# Altium PCB LTC4054 CHARGER BOARD.PcbDoc
Units mil, origin at the board's own origin, x right, y up, seen from the top; angles counter-clockwise.
Board outline 6000 x 4000 mil, 2 copper layers (Top Layer, Bottom Layer); 7 components, 0 nets, 17 pads, 0 vias.
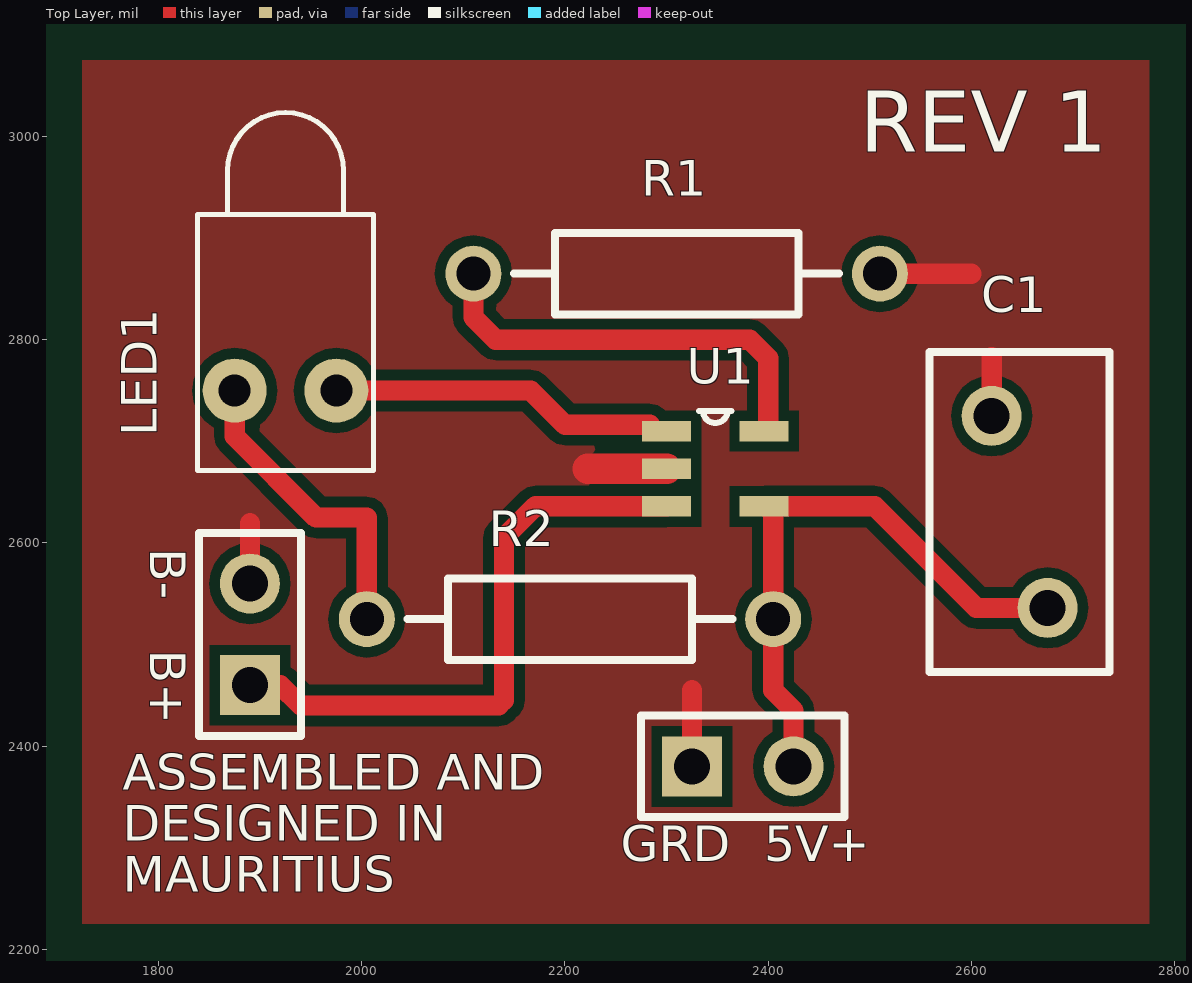
[diagram p0: Top Layer view]
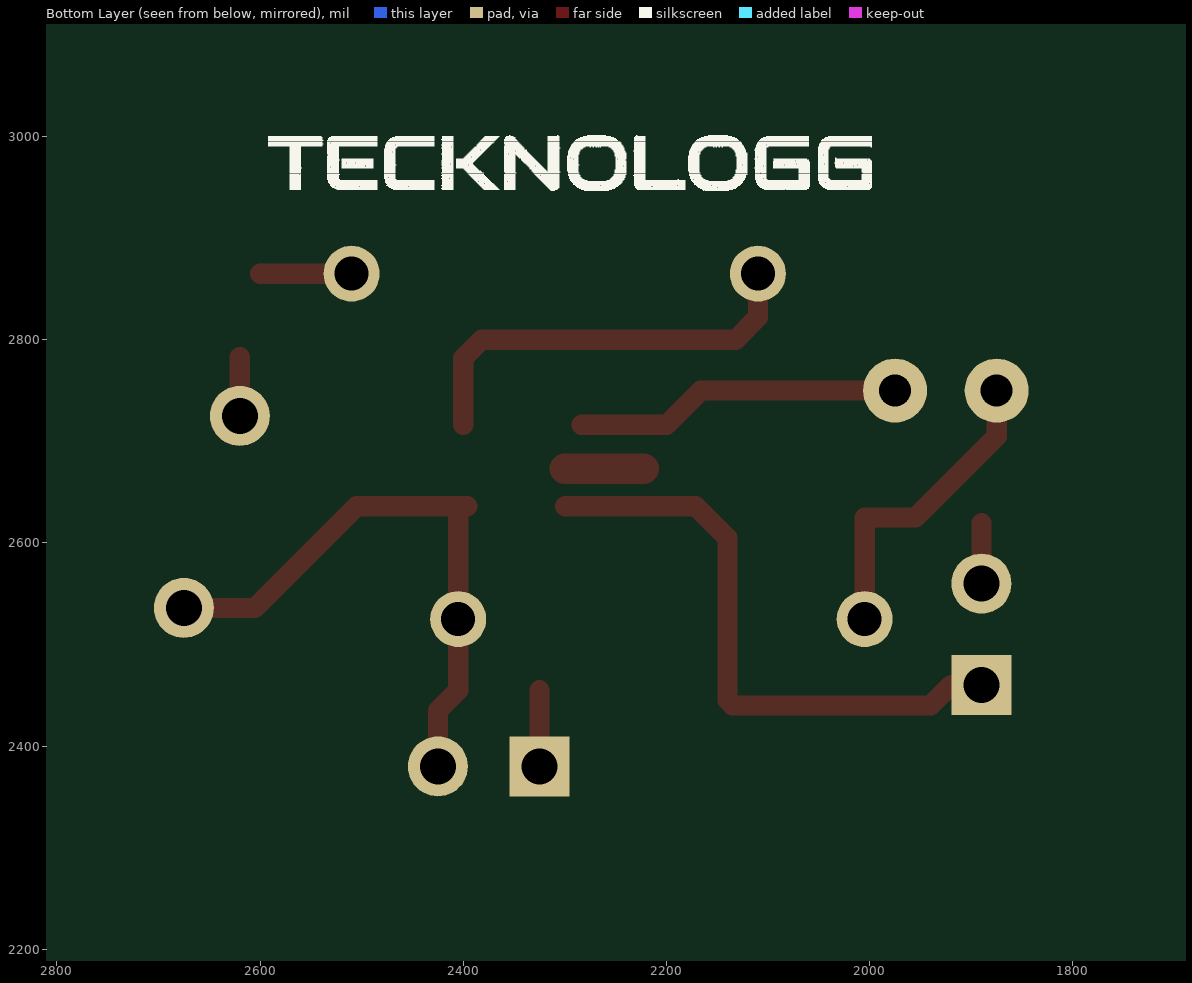
[diagram p1: Bottom Layer view, seen from below]

## Layer stack, top to bottom
Top Solder: solder mask 0.4, Solder Resist, Dk 3.5
Top Layer: signal copper 1.4
Dielectric 1: dielectric 12.6, FR-4, Dk 4.8
Bottom Layer: signal copper 1.4
Bottom Solder: solder mask 0.4, Solder Resist, Dk 3.5

## Board outline
1000,1000 7000,1000 7000,5000 1000,5000

## Design rules (kind name [scope] priority, off if disabled: settings)
Clearance [All] p1: gap=10 ignorepadtopadclearanceinfootprint=FALSE except(0: Arc-Hole Track-Hole SMDPad-Hole THPad-Hole Via-Hole Fill-Hole Poly-Hole Region-Hole Text-Hole)
PolygonConnect [All] p1: connectstyle=Relief reliefconductorwidth=10 reliefentries=4 polygonreliefangle="90 Angle" airgapwidth=10
RoutingVias [All] p1: holewidth=28 width=50 viastyle="Through Hole" minholewidth=28 minwidth=50 maxholewidth=28 maxwidth=50
SolderMaskExpansion [All] p1: expansion=4
Width [All] p1: maxlimit=10 minlimit=10 preferedwidth=10
30 further rules are at their usual default settings.

## Components (designator, comment, footprint, x,y, rotation, side; value= is the part's Value field where it differs from the comment)
? "Comment" CAPRD5-8X4.5 2647.56,2630.51 r90 top
? "Comment" HDR1X2 1890,2460 r90 top
? "Comment" HDR1X2 2325,2380 r0 top
? "Comment" SOT95P280X100-5N 2348,2673 r0 top
? "Comment" LED-1 1925,2750 r90 top
? "Comment" AXIAL-0.4 2205,2525 r180 top
? "Comment" AXIAL-0.4 2310,2865 r0 top

## Footprints (in the part's own frame and the unit in brackets; to place one, negate y for a bottom-side part, rotate by r counter-clockwise, add the part's x,y. Pads: shape width x height; smd on the part's side, far side on the other; paste and mask are expansions set on the pad)
AXIAL-0.4 [mm] "Axial Device, Thru-Hole; 2 Leads; 0.4 in Pin Spacing"
  round 1.4 hole 0.85: 1(-5.08,0) 2(5.08,0)
  silkscreen extent -4.06,-1.02 4.06,1.02
CAPRD5-8X4.5 [mm] "Capacitor, Ceramic, Thru-Hole, Disc; Body 8 x 4.5 mm (LxW max) Pin Spacing 5 mm (typ)"
  round 1.5 hole 0.9: 1(-2.4,-0.7) 2(2.4,0.7)
  silkscreen extent -4,-2.25 4,2.25
HDR1X2 [mm] "Connector; Header; 2 Position"
  rect 1.5x1.5 hole 0.9: 1(0,0)
  round 1.5 hole 0.9: 2(2.54,0)
  silkscreen extent -1.27,-1.27 3.81,1.27
LED-1 [mm] "LED; 2 Leads"
  round 1.6 hole 0.8: 1(0,1.27) 2(0,-1.27)
  silkscreen extent -2,-2.2 6.95,2.2
SOT95P280X100-5N [mil]
  rect 48x20 smd: 1(-48,37) 2(-48,0) 3(-48,-37) 4(48,-37) 5(48,37)
  silkscreen extent -16,45 16,57

## Nets (pads, with @x,y where several pads share a name; then routed paths per layer and width w, separated by ;. In a path a pad name is that pad's centre, name@x,y a point inside that pad or via, vN(x,y) a via of type N, cw(c..) or ccw(c..) an arc to the next point about the centre after c; other vN are vias at no path point)
pads on no net: ?.1 ?.2 ?.3 ?.4 ?.5
copper on no net: | length 2583.6
  Top Layer w10: 1890,2460 1920,2460 ; 2135,2440 2140,2445
  Top Layer w20: 1875,2750 1875,2705 1955,2625 2005,2625 2005,2525 ; 1890,2560 1890,2619.42 ; 1920,2460 1940,2440 2135,2440 ; 1975,2750 2166.46,2750 2200,2716.46 2283.54,2716.46 ; 2110,2865 2110,2822 2132,2800 2381.81,2800 2400,2781.81 2400,2716.46 ; 2140,2445 2140,2605 2171,2636 2300,2636 ; 2325,2380 2325,2455 ; 2396,2636 2505.02,2636 2605,2536.02 2675.12,2536.02 ; 2405,2636 2405,2525 2405,2455 2425,2435 2425,2380 ; 2510,2865 2600.07,2865 ; 2620,2725 2620,2783.07
  Top Layer w30: 2222.51,2673 2300,2673

## Polygon pours and split planes (outlines as drawn)
no net on Top Layer "AutoNaming" (solid, pour order 44): 1725,3075 2775,3075 2775,2225 1725,2225
no net on Top Layer "AutoNaming" (solid, pour order 24): 2186.79,2915
no net on Top Layer "AutoNaming" (solid, pour order 2): 2865,2980

## Silkscreen, mask and mechanical layers (free items; w line width, h text height)
Top Overlay:
  text "REV 1" at 2490,2985 h60
  text "R1" at 2275,2930 h60
  text "C1" at 2610,2815 h60
  text "U1" at 2320,2745 h60
  text "LED1" at 1810,2705 h60 r90
  text "B-" at 1780,2595 h60 r270
  text "R2" at 2125,2585 h60
  text "B+" at 1780,2495 h60 r270
  text "ASSEMBLED AND" at 1765,2345.47 h60
  text "DESIGNED IN" at 1765,2295 h60
  text "GRD" at 2255,2275 h60
  text "5V+" at 2396,2275 h60
  text "MAURITIUS" at 1765,2245 h60
Bottom Overlay:
  drawing of 849 lines, arcs and shapes, not listed
Mechanical 1:
  lines w10: 1725,2225 1725,3075 2775,3075 2775,2225 1725,2225